# EAGLE board gatesensor (EAGLE 6.1)
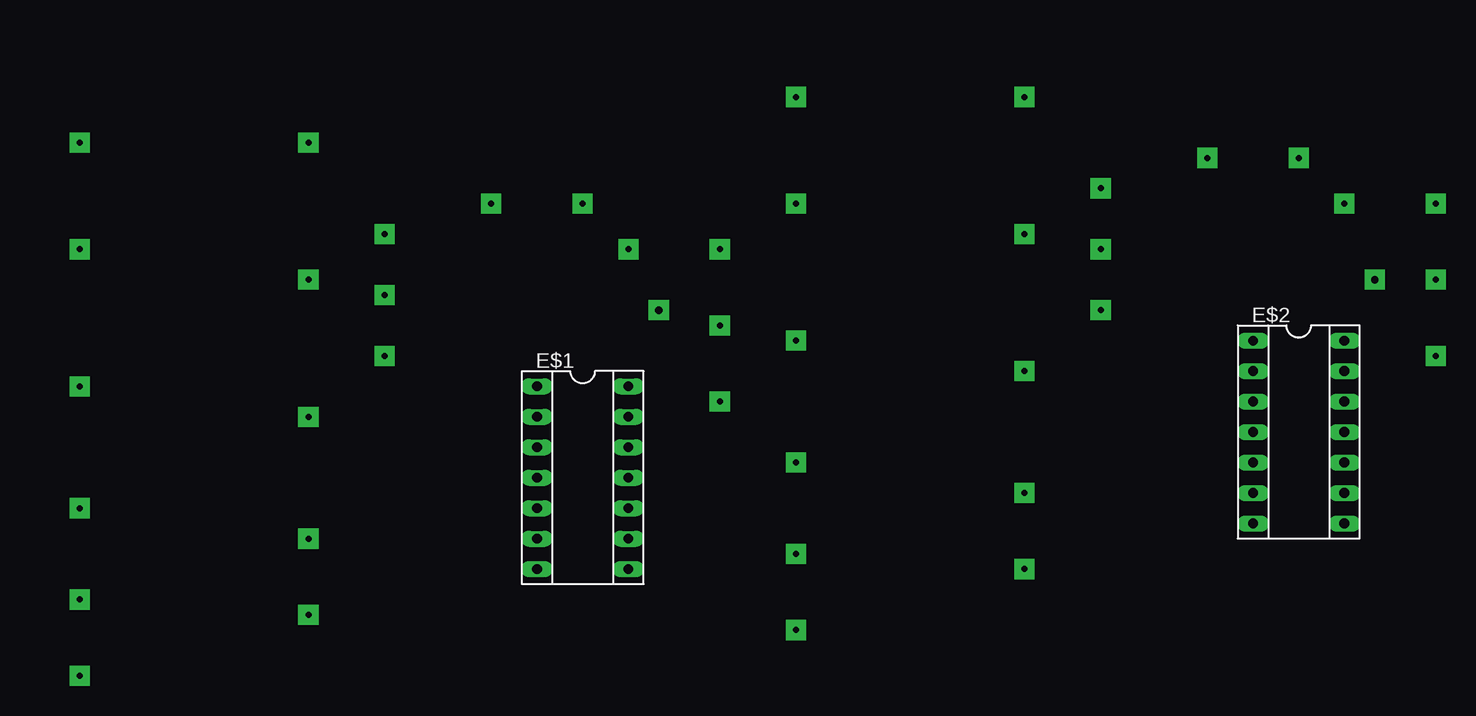
[diagram p0: board, top side]
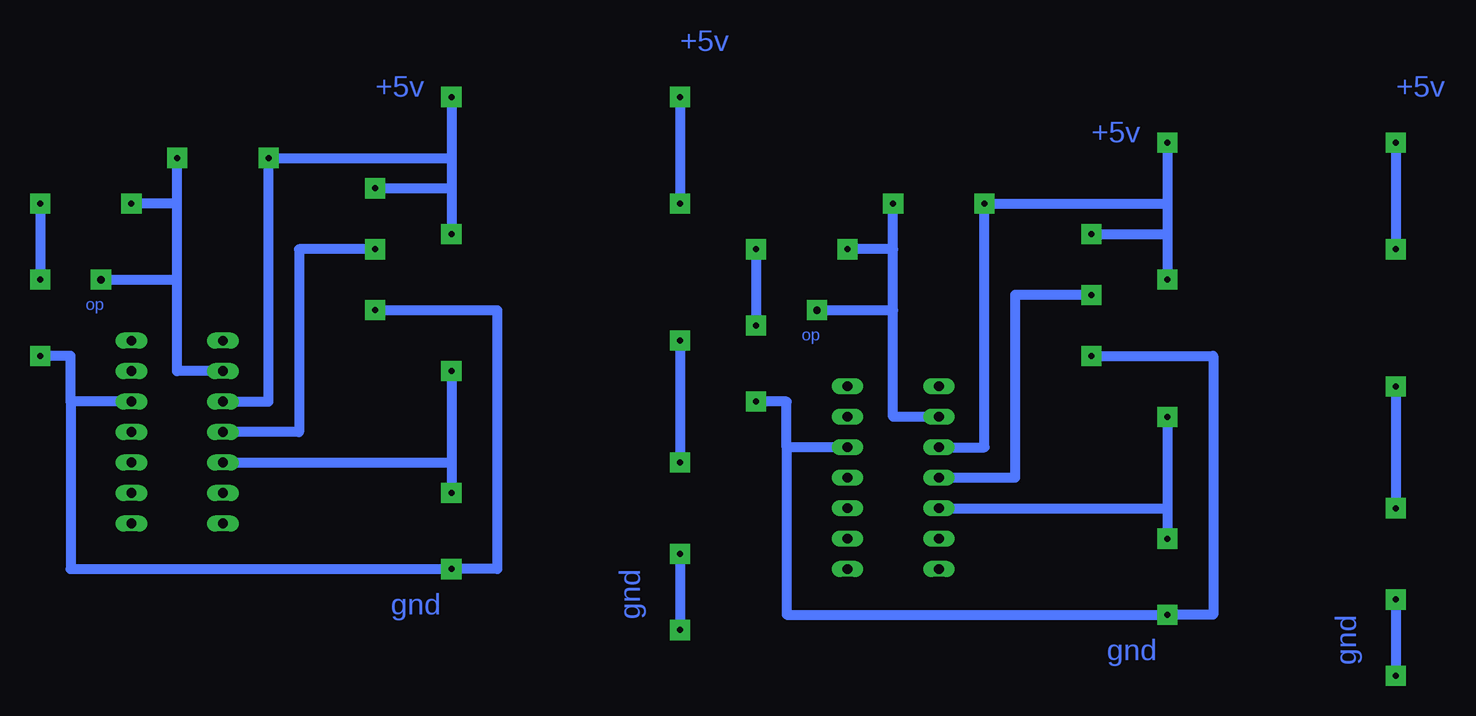
[diagram p1: board, bottom side, seen from below]

No outline drawn. Coordinates in mm, seen from the top.
Copper layers (1*16): Top 0.035mm / dielectric 1.5mm / Bottom 0.035mm
Design rules: minimum track width 10mil, minimum drill 24mil, track to track 8mil, track to pad 8mil, pad to pad 8mil, via to via 8mil, smd to smd 8mil, copper to edge 40mil, drill to drill 8mil, minimum pad ring 10mil, minimum via ring 8mil, stop-mask expansion 4mil, vias tented up to drill 0mil, thermal gap 10mil

## Footprints (pad centres in the part's own frame; a part is rotated, then mirrored left to right if it is on the bottom)
SOCKET-14 = drill 0.813 long: 1 -7.62,-3.81; 2 -5.08,-3.81; 3 -2.54,-3.81; 4 0,-3.81; 5 2.54,-3.81; 6 5.08,-3.81; 7 7.62,-3.81; 8 7.62,3.81; 9 5.08,3.81; 10 2.54,3.81; 11 0,3.81; 12 -2.54,3.81; 13 -5.08,3.81; 14 -7.62,3.81

## Placement (x,y rotation side)
E$1  [SOCKET-14]  53.34,57.15 270 top
E$2  [SOCKET-14]  113.03,60.96 270 top

## Library data of the parts
E$1 E$2 = ic-package

## Nets
S$2: E$1.3
S$4: E$1.4
S$6: E$1.12
S$8: E$1.5
S$13: E$2.5
S$14: E$2.4
S$15: E$2.12
S$18: E$2.3
S$19: E$1.2
S$20: E$2.2

## Tracks (layer width: path | path; a pad name or v marks a point on that pad's centre or on a via)
S$1  (via drill 0.5 pad 1.68)
  Bottom 0.813: v11.43,85.09 v11.43,76.2
S$2  (via drill 0.5 pad 1.68)
  Bottom 0.813: v30.48,85.09 30.48,80.01 | 30.48,80.01 30.48,77.47 | v36.83,77.47 30.48,77.47 | 30.48,77.47 v30.48,73.66 | E$1.3 45.72,59.69 v45.72,80.01 30.48,80.01
S$3  (via drill 0.5 pad 1.68)
  Bottom 0.813: v11.43,64.77 v11.43,54.61
S$4  (via drill 0.5 pad 1.68)
  Bottom 0.813: v36.83,72.39 43.18,72.39 43.18,57.15 E$1.4
S$5  (via drill 0.5 pad 1.68)
  Bottom 0.813: v11.43,46.99 v11.43,40.64
S$6  (via drill 0.5 pad 1.68)
  Bottom 0.813: E$1.12 62.23,59.69 | 62.23,59.69 62.23,45.72 v30.48,45.72 26.67,45.72 26.67,67.31 v36.83,67.31 | 62.23,59.69 62.23,63.5 v64.77,63.5
S$8  (via drill 0.5 pad 1.68)
  Bottom 0.813: v30.48,62.23 30.48,54.61 | 30.48,54.61 v30.48,52.07 | E$1.5 30.48,54.61
S$9  (via drill 0.5 pad 1.68)
  Bottom 0.813: v71.12,88.9 v71.12,80.01
S$10  (via drill 0.5 pad 1.68)
  Bottom 0.813: v71.12,68.58 v71.12,58.42
S$11  (via drill 0.5 pad 1.68)
  Bottom 0.813: v64.77,76.2 v64.77,69.85
S$12  (via drill 0.5 pad 1.68)
  Bottom 0.813: v71.12,50.8 v71.12,44.45
S$13  (via drill 0.5 pad 1.68)
  Bottom 0.813: v90.17,66.04 90.17,58.42 | 90.17,58.42 v90.17,55.88 | E$2.5 90.17,58.42
S$14  (via drill 0.5 pad 1.68)
  Bottom 0.813: v96.52,76.2 102.87,76.2 102.87,60.96 E$2.4
S$15  (via drill 0.5 pad 1.68)
  Bottom 0.813: E$2.12 121.92,63.5 | 121.92,63.5 121.92,49.53 v90.17,49.53 86.36,49.53 86.36,71.12 v96.52,71.12 | 121.92,63.5 121.92,67.31 v124.46,67.31
S$17  (via drill 0.5 pad 1.68)
  Bottom 0.813: v124.46,80.01 v124.46,73.66
S$18  (via drill 0.5 pad 1.68)
  Bottom 0.813: v90.17,88.9 90.17,83.82 | 90.17,83.82 90.17,81.28 | v96.52,81.28 90.17,81.28 | 90.17,81.28 v90.17,77.47 | E$2.3 105.41,63.5 v105.41,83.82 90.17,83.82
S$19  (via drill 0.5 pad 1.68, 0.6 pad 1.68)
  Bottom 0.813: E$1.2 53.34,62.23 53.34,71.12 | 53.34,71.12 53.34,76.2 | 53.34,76.2 v57.15,76.2 | 53.34,76.2 v53.34,80.01 | v59.69,71.12 53.34,71.12
S$20  (via drill 0.5 pad 1.68, 0.6 pad 1.68)
  Bottom 0.813: E$2.2 113.03,66.04 113.03,73.66 | 113.03,73.66 113.03,80.01 | 113.03,80.01 v116.84,80.01 | 113.03,80.01 v113.03,83.82 | v119.38,73.66 113.03,73.66

## Text on the board
Bottom: +5v | +5v | +5v | +5v | op | op | gnd | gnd | gnd | gnd